# Altium PCB bandit2.PcbDoc
Units mil, origin at the board's own origin, x right, y up, seen from the top; angles counter-clockwise.
Board outline 1125 x 1625 mil, 2 copper layers (Top Layer, Bottom Layer); 71 components, 50 nets, 254 pads, 70 vias.
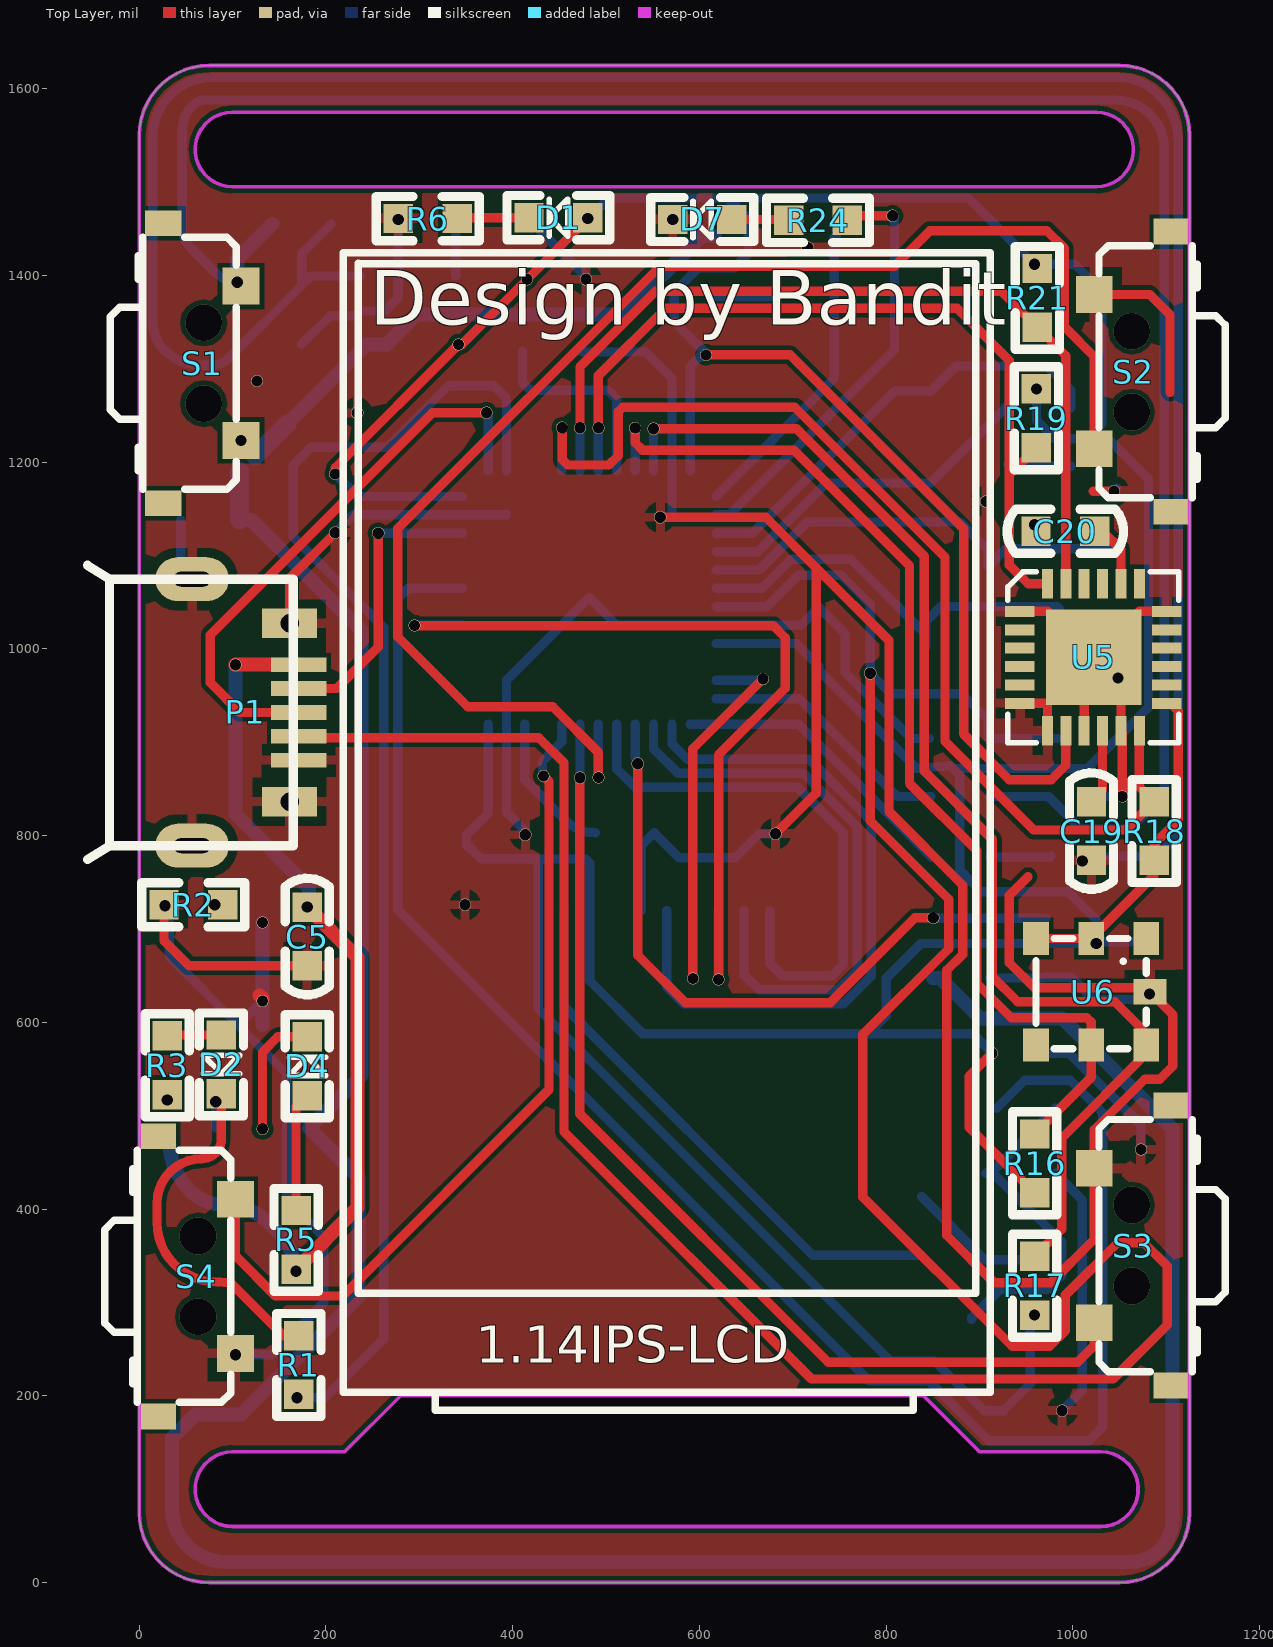
[diagram p0: Top Layer view]
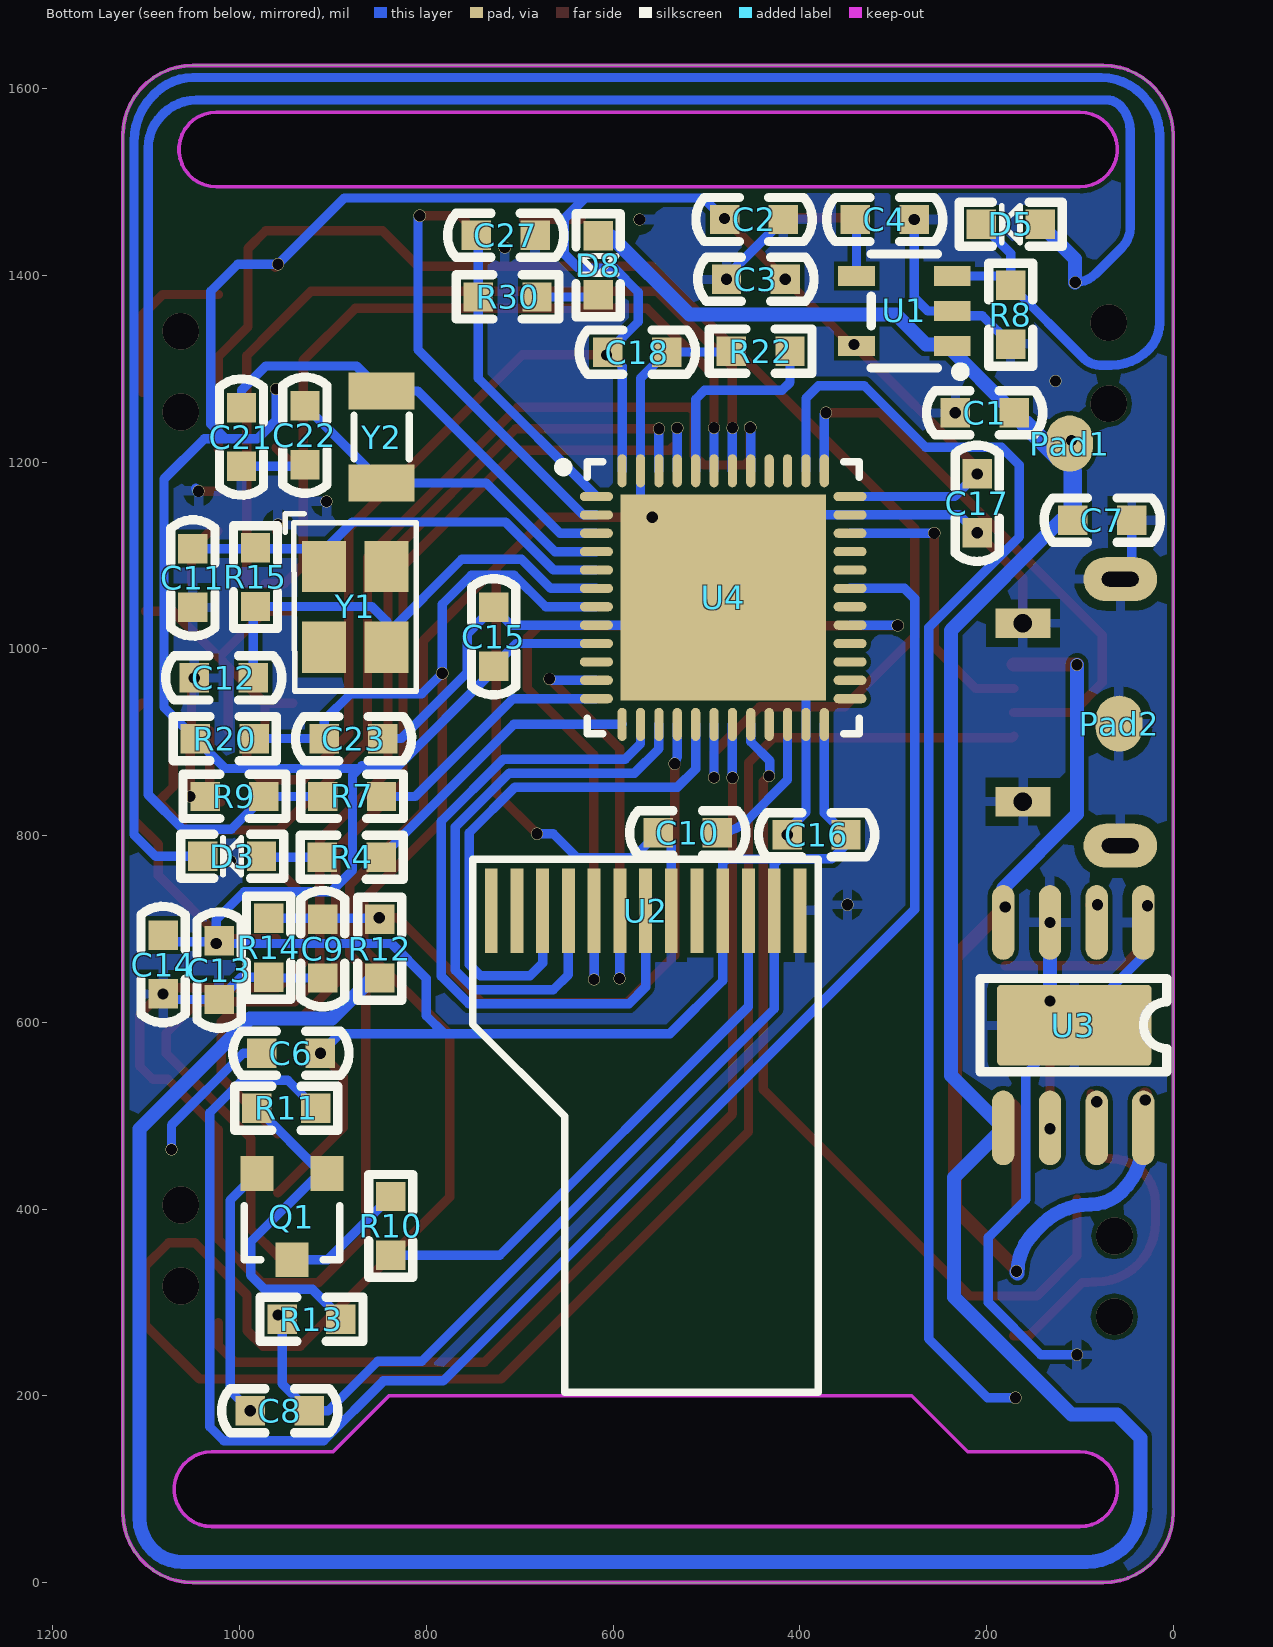
[diagram p1: Bottom Layer view, seen from below]
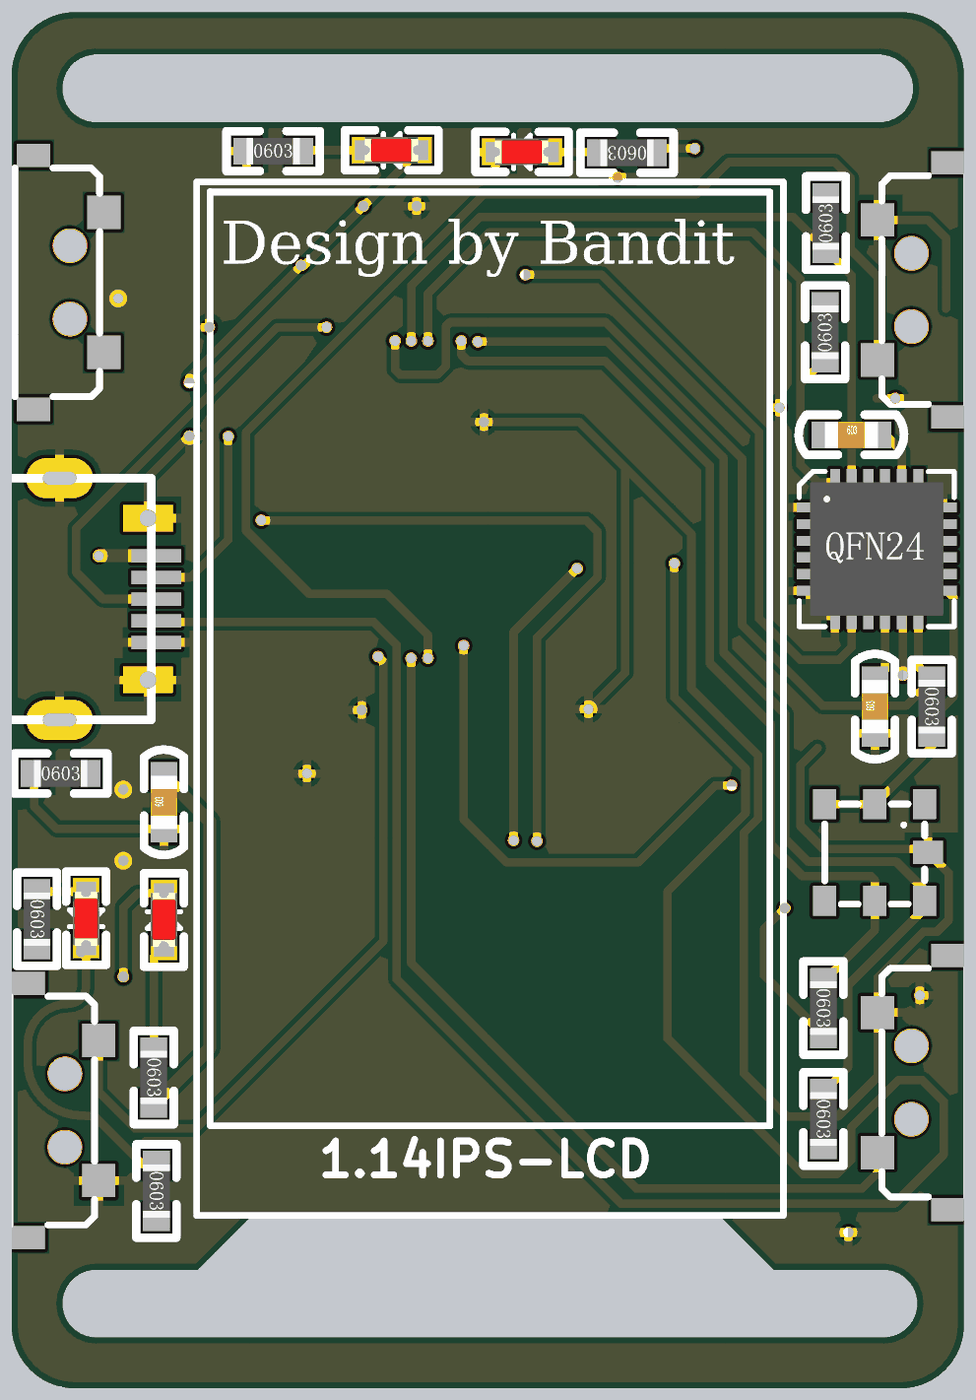
[diagram p2: 3D render of the assembled board from above, using the file's embedded part models]
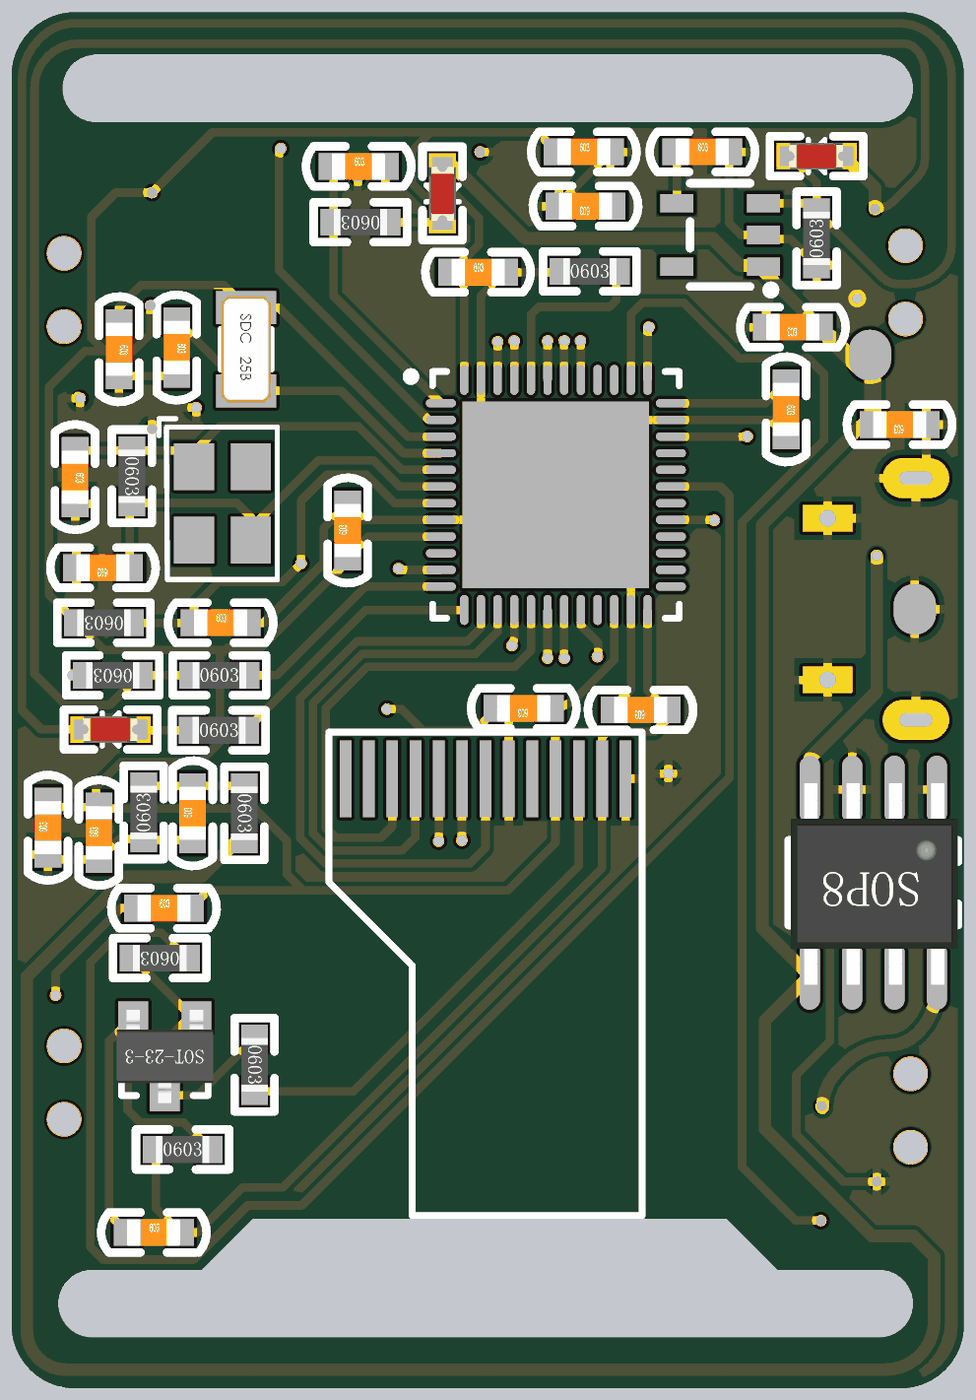
[diagram p3: 3D render of the assembled board from below, using the file's embedded part models]

## Layer stack, top to bottom
Top Layer: signal copper 1.4
Dielectric: dielectric 12.6, FR-4, Dk 4.8
Bottom Layer: signal copper 1.4

## Board outline
0,75 ccw(c75,75) 75,0 1050,0 ccw(c1050,75) 1125,75 1125,1550 ccw(c1050,1550) 1050,1625 75,1625 ccw(c75,1550) 0,1550
cut-out: 100,60 cw(c100,100) 100,140 220,140 280,200 840,200 900,140 1030,140 cw(c1030,100) 1030,60
cut-out: 100,1495 1025,1495 ccw(c1025,1535) 1025,1575 100,1575 ccw(c100,1535)

## Design rules (kind name [scope] priority, off if disabled: settings)
Clearance [All] p1: gap=5
PolygonConnect [All] p1: connectstyle=Relief reliefconductorwidth=10 reliefentries=4 polygonreliefangle="90 Angle" airgapwidth=10
RoutingVias [All] p1: holewidth=12 width=13 viastyle="Through Hole" minholewidth=12 minwidth=13 maxholewidth=12 maxwidth=13
SilkscreenOverComponentPads [All] p1: minsilkscreentomaskgap=10
SolderMaskExpansion [All] p1: expansion=4
Width [All] p1: maxlimit=50 minlimit=10 preferedwidth=10
27 further rules are at their usual default settings.

## Components (designator, comment, footprint, x,y, rotation, side; value= is the part's Value field where it differs from the comment)
C1 "105" 电容_C0603 202,1253 r0 bottom
C2 "104" 电容_C0603 449,1460 r180 bottom
C3 "104" 电容_C0603 447,1396 r0 bottom
C4 "22nf" 电容_C0603 309,1460 r180 bottom
C5 "10uf" 电容_C0603 180,692 r90 top
C6 "0.1uf" 电容_C0603 945,567 r180 bottom
C7 "10uf" 电容_C0603 76,1138 r0 bottom
C8 "0.1uf" 电容_C0603 957,184 r180 bottom
C9 "104" 电容_C0603 911,679 r90 bottom
C10 "22UF" 电容_C0603 520,803 r0 bottom
C11 "22PF" 电容_C0603 1050,1076 r270 bottom
C12 "22PF" 电容_C0603 1017,969 r0 bottom
C13 "4.7uf" 电容_C0603 1022,656 r90 bottom
C14 "104" 电容_C0603 1082,662 r90 bottom
C15 "104" 电容_C0603 728,1013 r90 bottom
C16 "104" 电容_C0603 382,801 r0 bottom
C17 "104" 电容_C0603 210,1156 r270 bottom
C18 "104" 电容_C0603 574,1318 r180 bottom
C19 "104" 电容_C0603 1020,805 r90 top
C20 "2.2nF" 电容_C0603 992,1126 r0 top
C21 "4.3PF" 电容_C0603 998,1227 r270 bottom
C22 "4.3PF" 电容_C0603 930,1229 r270 bottom
C23 "104" 电容_C0603 878,904 r180 bottom
C27 "104" 电容_C0603 715,1443 r180 bottom
D1 "red" LED_0603 449,1462 r180 top
D2 "red" LED_0603 88,555 r270 top
D3 "1n4148" LED_0603 1008,778 r0 bottom
D4 "green" LED_0603 180,553 r90 top
D5 "1n4148" LED_0603 174,1455 r0 bottom
D7 "red" LED_0603 603,1460 r180 top
D8 "1n4148" LED_0603 616,1411 r270 bottom
P1 "MICRO USB" "接插件_MICRO 牛角插座 USB 卷边" 165,932 r90 top
Pad1 "BAT" Pad_A 111,1220 r270 bottom
Pad2 "GND" Pad_A 58,920 r270 bottom
Q1 "S8050" 三极管_SOT-23 944,392 r0 bottom
R1 "2k" 电阻_R0603 171,233 r270 top
R2 "2k" 电阻_R0603 58,726 r0 top
R3 "2k" 电阻_R0603 30,554 r270 top
R4 "4.7K" 电阻_R0603 880,777 r180 bottom
R5 "2k" 电阻_R0603 168,367 r270 top
R6 "1K" 电阻_R0603 309,1461 r0 top
R7 "20K" 电阻_R0603 879.5,842 r180 bottom
R8 "1M" 电阻_R0603 174,1358 r90 bottom
R9 "20K" 电阻_R0603 1005.5,842 r0 bottom
R10 "10R" 电阻_R0603 838,382 r270 bottom
R11 "1K" 电阻_R0603 950,508 r0 bottom
R12 "20k" 电阻_R0603 850,679 r270 bottom
R13 "10K" 电阻_R0603 923,282 r180 bottom
R14 "20k" 电阻_R0603 969,680 r90 bottom
R15 "2k" 电阻_R0603 983,1077 r270 bottom
R16 "4.7K" 电阻_R0603 959,449 r270 top
R17 "4.7K" 电阻_R0603 959,318 r270 top
R18 "10K" 电阻_R0603 1087,805 r270 top
R19 "10K" 电阻_R0603 961,1247 r90 top
R20 "2k" 电阻_R0603 1016,904 r0 bottom
R21 "10K" 电阻_R0603 962,1376 r90 top
R22 "2k" 电阻_R0603 442,1319 r180 bottom
R24 "1K" 电阻_R0603 727,1459 r180 top
R30 "2k" 电阻_R0603 713,1377 r0 bottom
S1 "SW-PB" 侧面按键3*6*3.5 69,1306 r90 top
S2 "SW-PB" 侧面按键3*6*3.5 1063,1297 r270 top
S3 "SW-PB" 侧面按键3*6*3.5 1063,361 r270 top
S4 "SW-PB" 侧面按键3*6*3.5 63,328 r90 top
U1 "RT9193" SOT-23-5_L3.0-W1.7-P0.95-LS2.8-BR 288,1362 r180 bottom
U2 "IPS-LCD" 1.14IPS-LCD -112,456 r270 top
U3 "TP4056" SOP-8_PAD 106,597 r270 bottom
U4 "STM32F411CEU6" STM-UFQFPN48_N 482,1055 r180 bottom
U5 "MPU-6050" 陀螺仪_QFN24 1022,991 r0 top
U6 "BMP180" LGA-7 1118,493 r0 top
Y1 "25M" OSC-SMD_4P-L3.2-W2.5-BL 876,1045 r270 bottom
Y2 "32.768K" 晶振_3215 848,1227 r270 bottom

## Footprints (in the part's own frame and the unit in brackets; to place one, negate y for a bottom-side part, rotate by r counter-clockwise, add the part's x,y. Pads: shape width x height; smd on the part's side, far side on the other; paste and mask are expansions set on the pad)
1.14IPS-LCD [mm]
  rect 2.3x0.35 smd far side: 1(-6.7,21.4) 2(-6.7,20.7) 3(-6.7,20) 4(-6.7,19.3) 5(-6.7,18.6) 6(-6.7,17.9) 7(-6.7,17.2) 8(-6.7,16.5) 9(-6.7,15.8) 10(-6.7,15.1) 11(-6.7,14.4) 12(-6.7,13.7) 13(-6.7,13)
  silkscreen extent -24.6,8.4 6.9,26
LED_0603 [mm]
  rect 0.8x0.8 smd paste-0.1: A(-0.8,0) K(0.8,0)
  silkscreen extent -1.4,-0.6 1.4,0.6, body extent -0.8,-0.4 0.82,0.4, height 0.6
LGA-7 [mm]
  rect 0.7x0.9 smd: 1(-1,5) 2(-2.5,5) 3(-4,5) 4(-4,2.1) 5(-2.5,2.1) 6(-1,2.1)
  rect 0.9x0.7 smd: 7(-0.9,3.55)
  silkscreen extent -4,2 -1,5
OSC-SMD_4P-L3.2-W2.5-BL [mm]
  rect 1.4x1.2 smd: 1(-1.1,-0.851) 2(1.1,-0.851) 3(1.1,0.851) 4(-1.1,0.851)
  silkscreen extent -2.54,-1.9 2.29,1.65
Pad_A [mil]
  oval 60x50 smd: 1(0,0)
SOP-8_PAD [mil]
  oval 80x24 smd: 1(-110,74) 2(-110,24) 3(-110,-26) 4(-110,-76) 5(110,-76) 6(110,-26) 7(110,24) 8(110,74)
  rrect10% 86.61x165.35 smd: 3(0,0)
  silkscreen extent -50,-101 50,99, body extent -118,-99 120,99, height 63
SOT-23-5_L3.0-W1.7-P0.95-LS2.8-BR [mm]
  rect 1x0.55 smd: 1(1.3,-0.95) 2(1.3,0) 3(1.3,0.95) 4(-1.3,0.95) 5(-1.3,-0.95)
  silkscreen extent -0.9,-1.78 1.65,1.55
STM-UFQFPN48_N [mm] "QFN, 48-Leads, Body 7.1x7.1mm, Pitch 0.5mm, Thermal Pad 5.6x5.6mm, IPC Medium Den"
  oval 0.9x0.25 smd: 1(-3.45,2.75) 2(-3.45,2.25) 3(-3.45,1.75) 4(-3.45,1.25) 5(-3.45,0.75) 6(-3.45,0.25) 7(-3.45,-0.25) 8(-3.45,-0.75) 9(-3.45,-1.25) 10(-3.45,-1.75) 11(-3.45,-2.25) 12(-3.45,-2.75) 25(3.45,-2.75) 26(3.45,-2.25) 27(3.45,-1.75) 28(3.45,-1.25) 29(3.45,-0.75) 30(3.45,-0.25) 31(3.45,0.25) 32(3.45,0.75) 33(3.45,1.25) 34(3.45,1.75) 35(3.45,2.25) 36(3.45,2.75)
  oval 0.25x0.9 smd: 13(-2.75,-3.45) 14(-2.25,-3.45) 15(-1.75,-3.45) 16(-1.25,-3.45) 17(-0.75,-3.45) 18(-0.25,-3.45) 19(0.25,-3.45) 20(0.75,-3.45) 21(1.25,-3.45) 22(1.75,-3.45) 23(2.25,-3.45) 24(2.75,-3.45) 37(2.75,3.45) 38(2.25,3.45) 39(1.75,3.45) 40(1.25,3.45) 41(0.75,3.45) 42(0.25,3.45) 43(-0.25,3.45) 44(-0.75,3.45) 45(-1.25,3.45) 46(-1.75,3.45) 47(-2.25,3.45) 48(-2.75,3.45)
  rect 5.6x5.6 smd: 49(0,0)
  silkscreen extent -4.48,-3.7 3.7,3.7, body extent -3.55,-3.55 3.55,3.55, height 0.6
三极管_SOT-23 [mm]
  rect 0.9x0.95 smd: 1(-0.95,-1.175) 2(0,1.175) 3(0.95,-1.175)
  silkscreen extent -1.3,-0.3 1.3,1.18, body extent -1.45,-1.4 1.45,1.4, height 1.2
侧面按键3*6*3.5 [mm]
  rect 1x1 smd: 1(-2.1,-1.016) 2(2.1,-1.016)
  rect 0.7x1 smd: 4(-3.81,1.1) 5(3.81,1.1)
  silkscreen extent -3.43,-0.89 3.43,2.54, body extent -3.43,-0.89 3.43,1.65, height 4
"接插件_MICRO 牛角插座 USB 卷边" [mm]
  oval 1.2x2 hole 0.4 slot 1 at 90 deg: 0(-3.625,2.75) 0(3.625,2.75)
  rect 0.8x1.5 hole 0.5: 0(-2.425,0.1) 0(2.425,0.1)
  rect 0.4x1.5 smd: 1(1.3,-0.15) 2(0.65,-0.15) 3(0,-0.15) 4(-0.65,-0.15) 5(-1.3,-0.15)
  silkscreen extent -4,0 4,5.6
晶振_3215 [mm] "XTAL S"
  rect 1x1.8 smd: 1(-1.25,0) 2(1.25,0)
  silkscreen extent -0.6,-0.75 0.6,0.75, body extent -1.6,-0.75 1.6,0.75, height 0.81
电容_C0603 [mm]
  rect 0.8x0.8 smd: 1(-0.8,0) 2(0.8,0)
  silkscreen extent -1.58,-0.6 1.58,0.6, body extent -0.8,-0.4 0.8,0.4, height 0.3
电阻_R0603 [mm]
  rect 0.8x0.8 smd: 1(-0.8,0) 2(0.8,0)
  silkscreen extent -1.4,-0.6 1.4,0.6, body extent -0.8,-0.4 0.8,0.4, height 0.45
陀螺仪_QFN24 [mm]
  rect 2.6x2.6 smd: 0(0.005,0)
  rect 0.8x0.3 smd: 1(-2,1.25) 2(-2,0.75) 3(-2,0.25) 4(-2,-0.25) 5(-2,-0.75) 6(-2,-1.25) 13(2,-1.25) 14(2,-0.75) 15(2,-0.25) 16(2,0.25) 17(2,0.75) 18(2,1.25)
  rect 0.3x0.8 smd: 7(-1.25,-2) 8(-0.75,-2) 9(-0.25,-2) 10(0.25,-2) 11(0.75,-2) 12(1.25,-2) 19(1.25,2) 20(0.75,2) 21(0.25,2) 22(-0.25,2) 23(-0.75,2) 24(-1.25,2)
  silkscreen extent -2.32,-2.32 2.32,2.32, body extent -2,-2 2.01,2, height 0.9

## Part data
D3 D5 D8: library part Diode, "D"
U2: library part IPS-LCD-1.14, "IPS-LCD-1.14´çÂãÆ"
U4: library part Component_1
U6: "数字"
Y1 Y2: library part XTAL_A

## Via types
v1: diameter 13, hole 12, Top Layer to Bottom Layer, 62 vias
v2: diameter 39.37, hole 39.37, Top Layer to Bottom Layer, 8 vias

## Nets (pads, with @x,y where several pads share a name; then routed paths per layer and width w, separated by ;. In a path a pad name is that pad's centre, name@x,y a point inside that pad or via, vN(x,y) a via of type N, cw(c..) or ccw(c..) an arc to the next point about the centre after c; other vN are vias at no path point)
BAT: C1.1 C7.2 D8.A Pad1.1 R12.2 S1.1 U1.1 U3.5 | length 3790.7
  Bottom Layer w15: C7.2 120,1138 238,1020 238,543 U3.5 235,434 235,306 109,180 60,180 35,155 35,80 ccw(c93,80) 93,22 1061,22 ccw(c1061,68) 1107,68 1107,486 989,604 901.25,604 857.75,647.5 R12.2 ; C1.1@158.25,1240.75 C1.1 243.5,1326 265,1326 297,1358 518,1358 602.5,1442.5 D8.A
  Bottom Layer w20: C7.2 107.5,1189.99 ; Pad1.1@124.25,1206.75 C1.1@158.25,1240.75
  other v1: 109,1223.32
BAT_CHG: R1.2 U4.38 | length 1442.2
  Bottom Layer w10: v1(169,198) 199,198 262,261 262,1023 165,1120 165,1197 184,1216 265,1216 331,1282 380,1282 393.42,1268.58 U4.38
BAT_DET: C9.2 R12.1 R14.2 U4.16 | length 743.2
  Top Layer w10: v1(534,877) 534,672 585,621 740,621 831,712 v1(850.5,712)
  Bottom Layer w10: U4.16 531.21,885.73 ccw(c540.73,885.73) 534,879 v1(534,877) ; R12.1@851,711.5 R14.2@971,711.5
BMP180_SCL: R16.1 U4.45 U6.5 | length 1172
  Top Layer w10: v1(531.21,1236.79) 531.21,1220.79 539,1213 701,1213 825,1089 825,856 897,784 897,642 934,605 1015,605 1019.57,600.43 U6.5 1019.57,541.07 R16.1
  Bottom Layer w10: U4.45 v1(531.21,1236.79)
BMP180_SDA: R17.1 U4.46 U6.6 | length 1350.3
  Top Layer w10: v1(550.9,1235.9) 704.1,1235.9 841,1099 841,869 914,796 914,649 941,622 1045,622 1078.63,588.37 U6.6 1078.63,566.63 988,476 988,378.5 R17.1
  Bottom Layer w10: U4.46 v1(550.9,1235.9)
BOOT0: R22.2 U4.44 | length 218.6
  Bottom Layer w10: R22.2 410.5,1285.5 419,1277 502,1277 511.53,1267.47 U4.44
BOOT1: S4.2 U4.20 | length 908.6
  Top Layer w10: S4.2 103,350 146,307 218,307 439,528 439,858 v1(433,864)
  Bottom Layer w10: v1(433,864) 432,865 432,880 452.47,900.47 U4.20
CPOUT: C20.2 U5.20 | length 72.9
  Top Layer w10: C20.2 1032,1126 1051.53,1106.47 U5.20
EN: R7.2 U4.12 | length 273.6
  Bottom Layer w10: U4.12 707.27,946.73 812,842 R7.2
GND: C1.2 C2.2 C3.2 C4.2 C5.1 C6.1 C7.1 C8.1 C9.1 C10.2 C11.2 C12.2 C13.1 C14.1 C15.2 C16.2 C17.2 C18.2 C19.1 C20.1 C21.2 C22.2 C23.2 C27.2 D7.K P1.0 P1.5 Pad2.1 Q1.3 R2.1 R6.1 R8.1 R9.2 R14.1 R22.1 S2.1 S3.1 S4.1 U1.2 U2.8 U2.13 U3.1 U3.3 U4.8 U4.23 U4.35 U4.47 U4.49 U5.0 U5.1 U5.6 U5.7 U5.9 U5.11 U5.18 U6.7 | length 6365.3
  Top Layer w10: v1(27.5,725) R2.1 26.5,687.5 53.5,660.5 C5.1 ; v1(103,244) S4.1 ; P1.0@161.06,1027.47 161.06,1075.57 v1(210,1124.5) ; v1(558,1141) 671,1141 725,1087 ; v1(681.5,802) 725,845.5 725,1087 ; U5.6 972.6,941.79 U5.0@972.79,941.6 ; U5.1 972.96,1040.21 U5.0 ; 952,756 932,736 932,664 959,637 1078.33,637 U6.7 1107,608.33 1107,553 1093,539 1077,539 1023,485 S3.1 1023,367.86 976.14,321 916,321 865,372 865,655.79 882,672.79 882,747 803,826 803,1009 725,1087 ; v1(959,1133) 960.5,1131.5 C20.1 ; U5.7 U5.0@972.79,941.6 ; U5.9 U5.0@1012.16,980.97 ; 1022,1169 v1(1044,1169) ; S2.1 1082.32,1379.68 1104,1358 1104,1275 ; U5.0@1051.53,961.65 U5.11 1053,910.79 v1(1053,842) ; U5.18 1071.4,1040.21 U5.0 ; U5.0@972.79,941.6 U5.0@1012.16,980.97 ; U5.0@1012.16,980.97 U5.0
  Top Layer w15: 129,629 v1@132,626
  Bottom Layer w10: U3.1 32,671 U3.3@106,597 ; C7.1 44.5,1086.94 P1.0@56.73,1074.72 ; v1(103,244) 142,244 198,300 198,370 158,410 158,545 U3.3@106,597 ; v1(132,623) U3.3@106,597 ; R8.1 204.5,1357 231.82,1357 U1.2 263,1362 277.5,1376.5 v1(277.5,1460) ; v1(210,1124.5) 229.08,1143.58 U4.35 U4.49@393.42,1143.58 ; v1(349,726) v1@349,727 ; v1(413.5,801) 413.5,805 393.42,825.08 U4.23 393.42,966.42 U4.49 511.53,1025.47 U4.8 708.98,1025.47 C15.2 756,1016.5 756,975 827,904 C23.2 ; C2.2 C3.2@478.5,1399.01 ; R22.1 474.5,1318 C18.2 570.58,1289.92 U4.47 U4.49@570.58,1143.58 ; U2.8 537.61,789.11 C10.2 578.24,776.25 638.39,776.25 664.14,802 v1(681.5,802) ; C9.1 968,647.5 R14.1 998,648.5 C13.1 C14.1@1081,624.5 ; C22.2 932,1195.5 C21.2 ; v1@957.76,1134.24 v1(959,1133) ; C6.1 996,567 1073,490 v1(1073,464) ; Q1.3 1010,409.66 1010,205.5 v1(988.5,184) ; R9.2 v1(1053,842) ; v1(1044,1169) v1@1047,1172
  Bottom Layer w15: U3.3@132,597 v1(132,623) v1(132,707)
  other v1: 1082,630.5 1010,773 1048.5,969 907,1158 233.5,1253 126,1287 478.5,1396 716,1430 571.5,1460
KEY1: S2.2 U4.18 | length 1548.1
  Top Layer w10: v1(491.84,862.16) 491.84,889.16 443,938 352,938 277,1013 277,1129 558,1410 809,1410 847,1448 972,1448 991,1429 991,1345 1023,1313 S2.2
  Bottom Layer w10: v1(491.84,862.16) U4.18
KEY2: S3.2 U4.19 | length 1110.2
  Top Layer w10: v1(472,862) 472,502 738,236 1005,236 1023,254 S3.2
  Bottom Layer w10: v1(472,862) 472.16,862.16 U4.19
LED: R24.1 U4.2 | length 459.3
  Top Layer w10: R24.1 763.5,1464 v1(807,1464)
  Bottom Layer w10: U4.2 632.04,1143.58 809,1320.54 809,1462 v1(807,1464)
MPU6050_INT: R18.1 U4.41 U5.12 | length 1168.2
  Top Layer w10: v1(453,1237) 453,1203 459,1197 503,1197 513,1207 513,1254 518,1259 702.21,1259 863,1098.21 863,901 958,806 1056.5,806 R18.1 1071.21,852.28 U5.12
  Bottom Layer w10: U4.41 452.47,1236.47 v1(453,1237)
MPU6050_SCL: R21.1 U4.42 U5.23 | length 938
  Top Layer w10: v1(472.16,1236.84) 472.16,1302.16 553,1383 923.5,1383 R21.1 992.47,1314.03 U5.23
  Bottom Layer w10: U4.42 v1(472.16,1236.84)
MPU6050_SDA: R19.1 U4.43 U5.24 | length 904.4
  Top Layer w10: v1(491.84,1236.84) 491.84,1292.84 564,1365 876,1365 932,1309 932,1186.5 ; R19.1 932,1186.5 ; U5.24 952.26,1069.74 932,1090 932,1186.5
  Bottom Layer w10: U4.43 v1(491.84,1236.84)
NetC4_1: C4.1 U1.4 | length 61.1
  Bottom Layer w10: U1.4 339.18,1458.69 C4.1
NetC10_1: C10.1 U4.22 | length 156.3
  Bottom Layer w10: U4.22 413.1,859.9 456.92,816.08 ccw(c488.5,847.67) C10.1
NetC27_1: C27.1 R30.2 U4.1 | length 333
  Bottom Layer w10: U4.1 744.5,1289.94 R30.2 744.5,1441 C27.1
NetD1_K: D1.K R6.2 | length 77.4
  Top Layer w10: R6.2 341.5,1462 D1.K
NetD2_A: D2.A R3.1 | length 58.4
  Top Layer w10: R3.1 31,586.5 D2.A
NetD2_K: D2.K R1.1 U3.7 | length 417
  Top Layer w10: D2.K 88,475 cw(c67,475) 67,454 ccw(c67,406) 19,406 19,386 ccw(c83,386) 83,322 cw(c83,264.5) 91.2,321.41 97.59,321.41 154.5,264.5 R1.1
  Bottom Layer w10: U3.7 v1(82,515)
NetD3_A: D3.A R4.1 | length 65.4
  Bottom Layer w10: R4.1 975.5,777 D3.A
NetD3_K: D3.K D5.K R8.2 U1.3 | length 2563.2
  Bottom Layer w10: D5.K 174,1423.5 R8.2 ; U1.3 183.9,1399.4 R8.2 ; D3.K 1090,778 1113.03,801.03 1113.03,1543.65 ccw(c1043.53,1543.65) 1092.68,1592.79 1090.06,1595.41 ccw(c1050,1555.34) 1050,1612 77,1612 ccw(c77,1551.64) 34.32,1594.32 32.24,1592.24 ccw(c74.92,1549.57) 14.57,1549.57 14.57,1349.43 ccw(c55.61,1349.43) 26.59,1320.41 ccw(c66.21,1360.04) 66.21,1304 78.6,1304 ccw(c78.6,1327.9) 95.5,1311 R8.2
NetD4_A: D4.A R5.1 | length 128
  Top Layer w10: R5.1 168,509.5 D4.A
NetD4_K: D4.K U3.6 | length 136.8
  Top Layer w10: v1(132,486) 132,568 148.5,584.5 D4.K
NetD5_A: D5.A R7.1 R9.1 S1.2 | length 2280.3
  Bottom Layer w10: v1(105,1392.68) cw(c105,1423.28) 83.36,1401.64 54.96,1430.04 cw(c76.61,1451.68) 46,1451.68 46,1555.13 cw(c84.32,1555.13) 57.22,1582.22 cw(c71.06,1568.38) 71.06,1587.95 1046.17,1587.95 cw(c1046.17,1537.57) 1081.8,1573.2 1083.24,1571.76 cw(c1047.61,1536.13) 1098,1536.13 1098,844 1061,807 1009,807 R9.1 R7.1
  Bottom Layer w15: v1(105,1392.68) 105,1417.5 D5.A
NetD7_A: D7.A R24.2 | length 61.4
  Top Layer w10: D7.A 694.5,1460 R24.2
NetD8_K: D8.K R30.1 | length 66.5
  Bottom Layer w10: D8.K 618.5,1377 R30.1
NetQ1_1: Q1.1 R11.2 R13.2 | length 363.2
  Bottom Layer w10: R13.2 891.5,283.5 922,314 973,314 988,329 988,365 914.74,438.26 Q1.1@911.76,438.26 ; Q1.1 Q1.1@911.76,438.26 ; R11.2 Q1.1@911.76,438.26
NetQ1_2: Q1.2 R10.1 | length 134.1
  Bottom Layer w10: R10.1 905.76,345.74 Q1.2
NetR2_2: R2.2 U3.2 | length 8.5
  Top Layer w10: v1(81,726) R2.2
NRST: C23.1 P1.4 R20.1 U4.7 | length 3146.4
  Top Layer w10: P1.4 172.32,905 428,905 455,878 455,483 720,218 1043,218 1101,276 1101,339 1076,364 1048,364 992,308 992,270 975,253 935,253 775,413 775,587 867,679 867,732 783,816 v1(783,974)
  Bottom Layer w10: U4.7 672.16,1045.16 706,1079 752,1079 783,1048 v1(783,974) 805,952 881,952 909.5,923.5 C23.1 R20.1
POWER_ON: R4.2 U4.13 | length 317.1
  Bottom Layer w10: U4.13 706.33,919.17 R4.2
REGOUT: C19.2 U5.10 | length 80.7
  Top Layer w10: C19.2 1031.84,848.34 U5.10
SWCLK: P1.3 U4.37 | length 616.6
  Top Layer w10: P1.3 108,932 76,964 76,1015 314,1253 v1(372,1253)
  Bottom Layer w10: v1(372,1253) 373.73,1251.27 U4.37
SWDIO: P1.2 U4.34 | length 315.7
  Top Layer w10: P1.2 211.59,957.59 256,1002 v1(256,1124)
  Bottom Layer w10: v1(256,1124) 256.1,1123.9 U4.34
TFT_BLK: R11.1 U4.31 | length 1880.1
  Bottom Layer w10: U4.31 287.84,1064.84 277,1054 277,721 782,216 846,216 910,152 1017,152 1032,167 1032,503.13 997.13,538 948.5,538 R11.1
TFT_CS: U2.7 U4.14 | length 754.8
  Bottom Layer w10: U2.7 565.17,637.83 583,620 754.43,620 784,649.57 784,815.43 717.43,882 587,882 570.58,898.42 U4.14
TFT_DC: U2.5 U4.29 | length 923.2
  Top Layer w10: v1(295,1025) 679,1025 692,1012 692,958 620.57,886.57 v1(620.57,646)
  Bottom Layer w10: v1(295,1025) 295.47,1025.47 U4.29 ; U2.5 620.28,646.28 v1(620.57,646)
TFT_LEDK: R10.2 U2.11 | length 596.2
  Bottom Layer w10: U2.11 454.93,617.07 721.5,350.5 R10.2
TFT_RES: U2.6 U4.11 | length 475.8
  Top Layer w10: v1(593,647) 593,893 v1(668,968)
  Bottom Layer w10: U2.6 593,719.5 v1(593,647) ; U4.11 666.42,966.42 v1(668,968)
TFT_SCL: U2.4 U4.15 | length 637.4
  Bottom Layer w10: U4.15 550.9,893.1 577,867 711.21,867 769,809.21 769,655.79 748.21,635 664,635 647.84,651.16 U2.4
TFT_SDA: U2.3 U4.17 | length 604.9
  Bottom Layer w10: U4.17 511.53,871.47 531,852 705,852 754,803 754,662 742,650 689,650 675.4,663.6 U2.3
USB_VCC: C5.2 P1.1 R3.2 R5.2 U3.4 U3.8 | length 1023.6
  Top Layer w15: v1(30,517) R3.2 ; v1(103,983) 103.18,983.18 P1.1 ; R5.2 234,401.5 234,669.5 v1(180,723.5)
  Bottom Layer w15: U3.8@32,474.53 ccw(c110.53,474.53) 55,419 ccw(c88.8,452.8) 88.8,405 cw(c88.8,332.09) 140.36,383.64 148.62,375.38 cw(c104.23,331) 167,331 ccw(c164.59,333.41) v1(168,333.41) ; v1(103,983) 103,823 182,744 U3.4@182,723.5
VCC3.3: C2.1 C3.1 C6.2 C8.2 C13.2 C14.2 C15.1 C16.1 C17.1 C18.1 D1.A R13.1 R16.2 R17.2 R18.2 R19.2 R20.2 R21.2 U1.5 U2.10 U2.12 U4.9 U4.24 U4.36 U4.48 U5.8 U5.13 U6.2 U6.3 | length 6433.4
  Top Layer w10: v1(210,1187.5) 210,1194 v1(342,1326) 345.5,1326 v1(415.5,1396) v1(480.5,1460.99) D1.A ; v1(607,1315) 697,1315 883,1129 883,909 932,860 977,860 992.47,875.47 U5.8 ; v1(913.5,567) 889,542.5 889,487.5 R16.2 ; v1(959,1412) R21.2@962,1409 ; U6.3 U6.2 1087,757.28 R18.2 1087,790.86 1112.75,816.61 1112.75,933.72 1104.68,941.79 U5.13
  Bottom Layer w10: v1(210,1187.5) 234.23,1163.27 U4.36 ; U1.5@340.61,1324.6 v1(342,1326) ; U4.24 373.73,824.23 C16.1 350.5,790.5 365.75,775.25 421.75,775.25 421.94,775.06 ; C2.1@480.99,1460.5 503.53,1483.03 630,1483.03 ; U4.48 590.27,1302.77 C18.1 573,1350.5 573,1382.14 598.86,1408 637,1408 652,1423 652,1461.03 630,1483.03 ; C18.1@605.5,1316.5 v1(607,1315) ; U4.9 703.72,1005.79 C15.1 728,976.87 832.87,872 869,875 ; v1(913.5,567) 892.5,588 781,588 ; R13.1 954.5,212.99 C8.2 905,184 852,237 805,237 427.37,614.63 U2.12 427.37,769.63 421.94,775.06 ; v1(961,1278.5) 961,1245 981,1225 1015,1225 ; C14.2@1082,686.5 1027.07,686.5 v1(1025,684.43) ; 421.94,775.06 477.94,775.06 482.49,770.51 U2.10 482.49,644.51 539,588 781,588 ; 630,1483.03 887.97,1483.03 v1(959,1412) 1002,1412 1031,1383 1031,1241 1015,1225 ; 781,588 800,607 800,647 837.43,684.43 v1(1025,684.43) ; 1015,1225 1038,1225 1081,1182 1081,937.5 R20.2 1015.5,872 872,872 879,865 879,763 902,740 995,740 1025,710 v1(1025,684.43)
  other v1: 959,286.5
XTALA: C11.1 R15.1 U4.5 Y1.1 | length 491.3
  Bottom Layer w10: U4.5 663.74,1084.53 715.21,1136 879,1136 909.5,1105.5 Y1.1 928.69,1107.5 C11.1
XTALB: C12.1 R15.2 U4.6 Y1.3 | length 523.4
  Bottom Layer w10: U4.6 666.84,1064.84 698,1096 762,1096 Y1.3@842.49,1015.51 ; Y1.3 Y1.3@842.49,1015.51 ; C12.1 985.5,1043 R15.2 858.5,1045.5 842.49,1029.49 Y1.3@842.49,1015.51
XTALC: C21.1 U4.3 Y2.1 | length 483.6
  Bottom Layer w10: U4.3 656.9,1123.9 809.21,1276.21 Y2.1 874.79,1303 972,1303 998,1277 C21.1
XTALD: C22.1 U4.4 Y2.2 | length 377.3
  Bottom Layer w10: U4.4 662.21,1104.21 735.79,1177.79 Y2.2 848,1178.5 C22.1
pads on no net: S1.4 S1.5 S2.4 S2.5 S3.4 S3.5 S4.4 S4.5 U2.1 U2.2 U2.9 U4.10 U4.21 U4.25 U4.26 U4.27 U4.28 U4.30 U4.32 U4.33 U4.39 U4.40 U5.2 U5.3 U5.4 U5.5 U5.14 U5.15 U5.16 U5.17 U5.19 U5.21 U5.22 U6.1 U6.4 Y1.2 Y1.4
copper on no net:
  other v2: 63,284.69 1063,317.69 63,371.31 1063,404.31 1063,1253.69 69,1262.69 1063,1340.31 69,1349.31

## Polygon pours and split planes (outlines as drawn)
GND on Bottom Layer "Bottom Layer-No Net" (solid, remove dead copper, pour order 16): -176,1736 1491,1736 1493,1734 1385,1626 1385,-240 -273,-240 -333,-180 -174,-21 -174,1745
GND on Top Layer "Bottom Layer-No Net" (solid, remove dead copper, pour order 14): -192,1708 1287,1708 1342,1653 1323,1634 1323,-143 1314,-134 -146,-134 -188,-92 -188,1697

## Keep-outs
Keep-Out Layer:
  lines w3.94: 0,75 ccw(c75,75) 75,0 1050,0 ccw(c1050,75) 1125,75 1125,1550 ccw(c1050,1550) 1050,1625 75,1625 ccw(c75,1550) 0,1550 0,75 ; 100,60 cw(c100,100) 100,140 220,140 280,200 290,200 840,200 900,140 1030,140 cw(c1030,100) 1030,60 100,60 ; 100,1495 cw(c100,1535) 100,1575 1025,1575 cw(c1025,1535) 1025,1495 100,1495

## Silkscreen, mask and mechanical layers (free items; w line width, h text height)
Top Overlay:
  text "Design by Bandit" at 247,1328 h100

## Text inside footprints (layer, text, board x,y; h text height)
U2: Top Overlay "1.14IPS-LCD" at 360.44,235.53 h40